# EAGLE board barath pcb 5 (EAGLE 6.5.0)
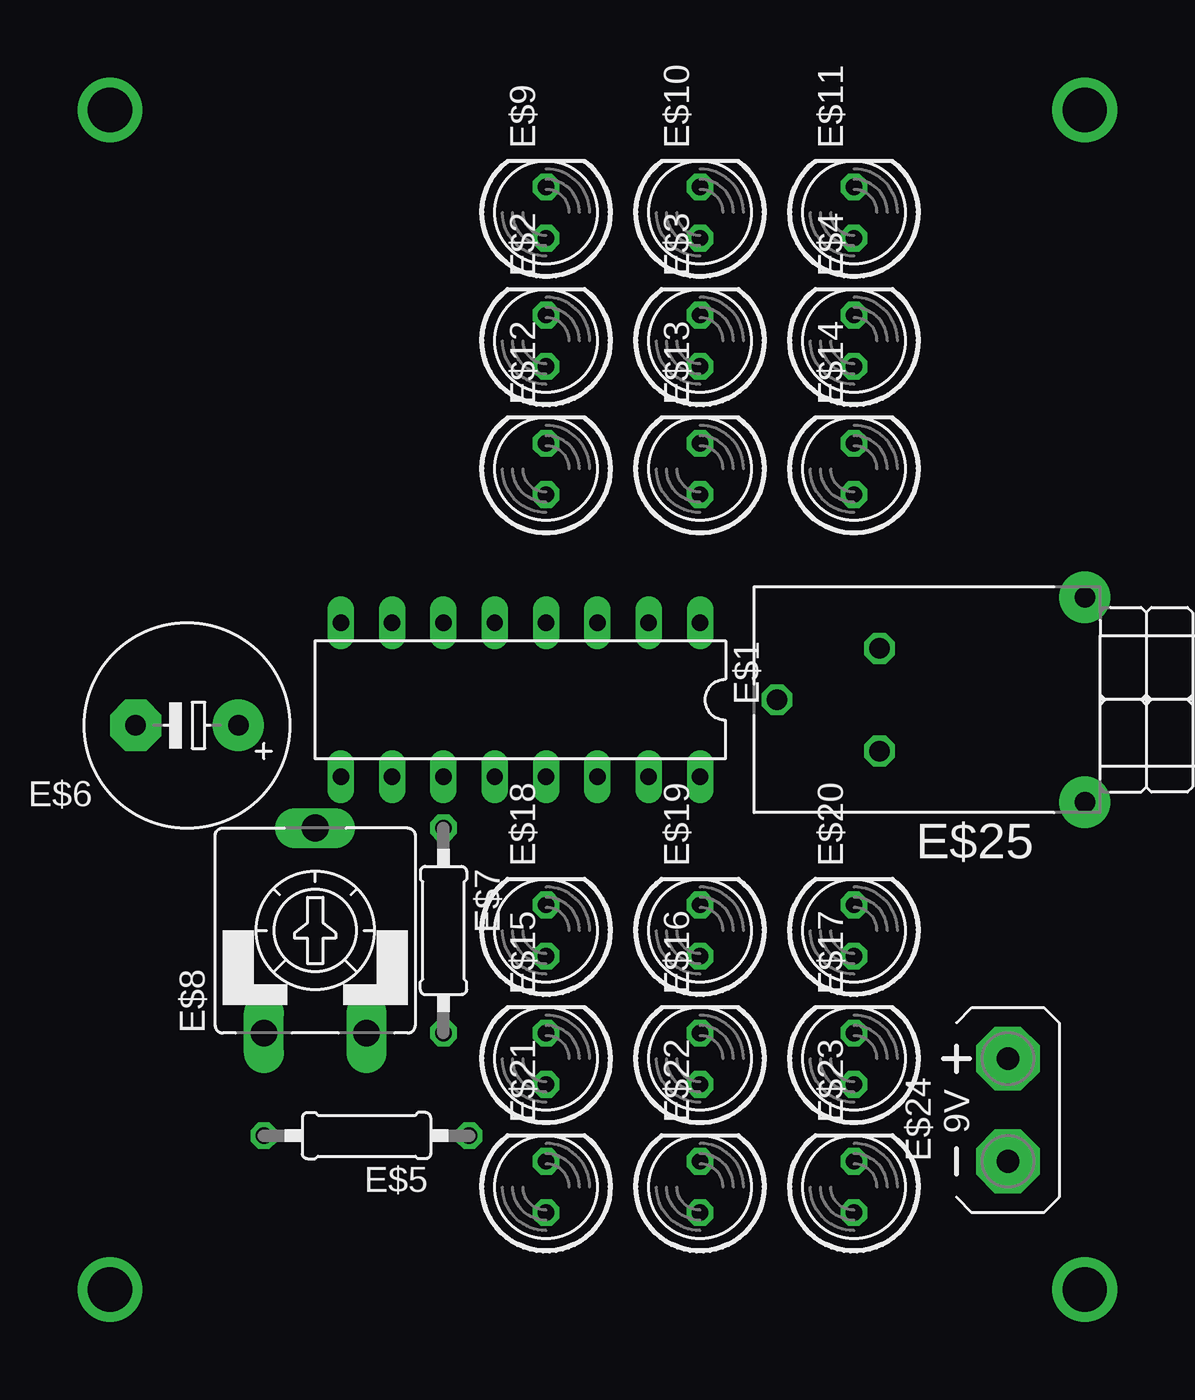
[diagram p0: board, top side]
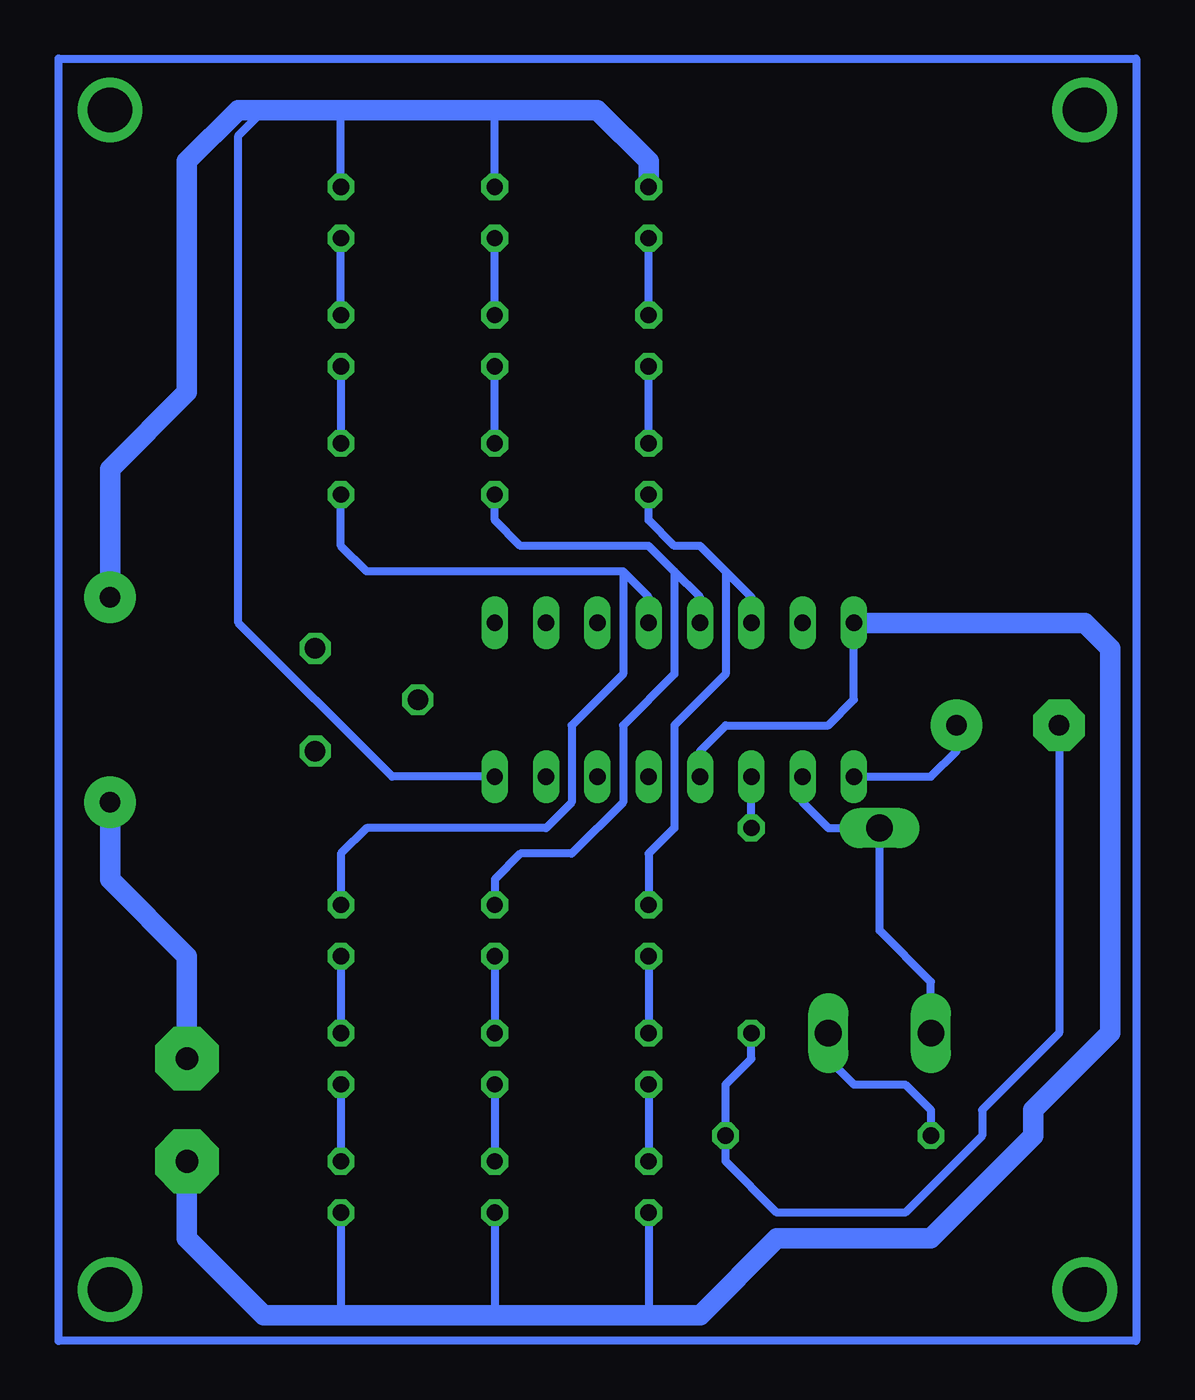
[diagram p1: board, bottom side, seen from below]

No outline drawn. Coordinates in mm, seen from the top.
Copper layers (1*16): Top 0.035mm / dielectric 1.5mm / Bottom 0.035mm
Design rules "default": minimum track width 10mil, minimum drill 24mil, track to track 8mil, track to pad 8mil, pad to pad 8mil, via to via 8mil, smd to smd 8mil, copper to edge 40mil, drill to drill 8mil, minimum pad ring 10mil, minimum via ring 8mil, stop-mask expansion 4mil, vias tented up to drill 0mil, thermal gap 10mil

## Footprints (pad centres in the part's own frame; a part is rotated, then mirrored left to right if it is on the bottom)
DIL16 = drill 0.813 long: 1 -8.89,-3.81; 2 -6.35,-3.81; 3 -3.81,-3.81; 4 -1.27,-3.81; 5 1.27,-3.81; 6 3.81,-3.81; 7 6.35,-3.81; 8 8.89,-3.81; 9 8.89,3.81; 10 6.35,3.81; 11 3.81,3.81; 12 1.27,3.81; 13 -1.27,3.81; 14 -3.81,3.81; 15 -6.35,3.81; 16 -8.89,3.81
LED5MM = drill 0.813 octagon: A -1.27,0; K 1.27,0
0207/10 = drill 0.813 octagon: 1 -5.08,0; 2 5.08,0
E5-10,5 = drill 1.016 pad 2.54: + -2.54,0 | drill 1.016 pad 2.54 octagon: - 2.54,0
CA9V = drill 1.321 long: A -2.54,-5.08; E 2.54,-5.08; S 0,5.08
AB9V = drill 1.118 pad 3.15 octagon: + 0,2.54; - 0,-2.54
316-917 = drill 1.016 octagon: 1 10.16,2.54; 2 15.24,0; 3 10.16,-2.54 | drill 1.016 pad 2.54: B 0,-5.08; B1 0,5.08

## Placement (x,y rotation side)
E$1  [DIL16]  22.86,31.75 180 top
E$2  [LED5MM]  24.13,49.53 90 top
E$3  [LED5MM]  31.75,49.53 90 top
E$4  [LED5MM]  39.37,49.53 90 top
E$5  [0207/10]  15.24,10.16 180 top
E$6  [E5-10,5]  6.35,30.48 180 top
E$7  [0207/10]  19.05,20.32 270 top
E$8  [CA9V]  12.7,20.32 0 top
E$9  [LED5MM]  24.13,55.88 90 top
E$10  [LED5MM]  31.75,55.88 90 top
E$11  [LED5MM]  39.37,55.88 90 top
E$12  [LED5MM]  24.13,43.18 90 top
E$13  [LED5MM]  31.75,43.18 90 top
E$14  [LED5MM]  39.37,43.18 90 top
E$15  [LED5MM]  24.13,13.97 90 top
E$16  [LED5MM]  31.75,13.97 90 top
E$17  [LED5MM]  39.37,13.97 90 top
E$18  [LED5MM]  24.13,20.32 90 top
E$19  [LED5MM]  31.75,20.32 90 top
E$20  [LED5MM]  39.37,20.32 90 top
E$21  [LED5MM]  24.13,7.62 90 top
E$22  [LED5MM]  31.75,7.62 90 top
E$23  [LED5MM]  39.37,7.62 90 top
E$24  [AB9V]  46.99,11.43 0 top
E$25  [316-917]  50.8,31.75 180 top

## Library data of the parts
E$1 = ic-package
E$2-E$4 E$9-E$23 = led
E$5-E$7 = resistor
E$8 = pot
E$24 = battery
E$25 = switch

## Nets
S$2: E$1.6 E$12.A E$18.K
S$3: E$1.5 E$13.A E$19.K
S$4: E$1.4 E$14.A E$20.K
S$5: E$2.A E$12.K
S$6: E$2.K E$9.A
S$7: E$1.9 E$6.+
S$9: E$5.2 E$8.E
S$10: E$1.11 E$7.1
S$11: E$5.1 E$6.- E$7.2
S$13: E$1.8 E$1.12 E$21.A E$22.A E$23.A E$24.-
S$14: E$3.K E$10.A
S$15: E$4.A E$14.K
S$16: E$4.K E$11.A
S$17: E$3.A E$13.K
S$18: E$15.K E$18.A
S$19: E$16.K E$19.A
S$20: E$17.K E$20.A
S$21: E$17.A E$23.K
S$22: E$16.A E$22.K
S$23: E$15.A E$21.K
S$25: E$1.10 E$8.A E$8.S
S$28: E$24.+ E$25.B1
S$29: E$1.16 E$9.K E$10.K E$11.K E$25.B

## Tracks (layer width: path | path; a pad name or v marks a point on that pad's centre or on a via)
S$1
  Bottom 0.406: 0,0 53.34,0 53.34,63.5 0,63.5 0,0
S$2
  Bottom 0.406: E$1.6 19.05,36.83 20.32,38.1 | 20.32,38.1 21.59,39.37 22.86,39.37 24.13,40.64 E$12.A | 20.32,38.1 20.32,33.02 22.86,30.48 22.86,25.4 24.13,24.13 E$18.K
S$3
  Bottom 0.406: E$1.5 21.59,36.83 22.86,38.1 | 22.86,38.1 24.13,39.37 30.48,39.37 31.75,40.64 E$13.A | 22.86,38.1 22.86,33.02 25.4,30.48 25.4,26.67 27.94,24.13 30.48,24.13 31.75,22.86 E$19.K
S$4
  Bottom 0.406: E$1.4 24.13,36.83 25.4,38.1 | 25.4,38.1 38.1,38.1 39.37,39.37 E$14.A | 25.4,38.1 25.4,33.02 27.94,30.48 27.94,26.67 29.21,25.4 38.1,25.4 39.37,24.13 E$20.K
S$5
  Bottom 0.406: E$12.K E$2.A
S$6
  Bottom 0.406: E$2.K E$9.A
S$7
  Bottom 0.406: E$1.9 10.16,27.94 8.89,29.21 E$6.+
S$8  (via drill 2.2 pad 2.54)
  other vias: 2.54,60.96
S$9
  Bottom 0.406: E$8.E 15.24,13.97 13.97,12.7 11.43,12.7 10.16,11.43 E$5.2
S$10
  Bottom 0.406: E$7.1 E$1.11
S$11
  Bottom 0.406: E$6.- 3.81,15.24 7.62,11.43 7.62,10.16 11.43,6.35 17.78,6.35 20.32,8.89 E$5.1 20.32,12.7 19.05,13.97 E$7.2
S$12  (via drill 2.2 pad 2.54)
  other vias: 50.8,60.96
S$13
  Bottom 0.406: E$1.12 21.59,29.21 20.32,30.48 15.24,30.48 13.97,31.75 E$1.8 | E$21.A 24.13,1.27 | E$22.A 31.75,1.27 | E$23.A 39.37,1.27
  Bottom 1.016: E$1.8 2.54,35.56 1.27,34.29 1.27,15.24 5.08,11.43 5.08,10.16 10.16,5.08 11.43,5.08 12.7,5.08 17.78,5.08 21.59,1.27 24.13,1.27 31.75,1.27 39.37,1.27 43.18,1.27 46.99,5.08 E$24.-
S$14
  Bottom 0.406: E$3.K E$10.A
S$15
  Bottom 0.406: E$4.A E$14.K
S$16
  Bottom 0.406: E$4.K E$11.A
S$17
  Bottom 0.406: E$13.K E$3.A
S$18
  Bottom 0.406: E$18.A E$15.K
S$19
  Bottom 0.406: E$19.A E$16.K
S$20
  Bottom 0.406: E$20.A E$17.K
S$21
  Bottom 0.406: E$17.A E$23.K
S$22
  Bottom 0.406: E$16.A E$22.K
S$23
  Bottom 0.406: E$15.A E$21.K
S$25
  Bottom 0.406: E$8.A 10.16,17.78 12.7,20.32 E$8.S 15.24,25.4 16.51,26.67 E$1.10
S$26  (via drill 2.2 pad 2.54)
  other vias: 50.8,2.54
S$27  (via drill 2.2 pad 2.54)
  other vias: 2.54,2.54
S$28
  Bottom 1.016: E$24.+ 46.99,19.05 50.8,22.86 E$25.B1
S$29
  Bottom 0.406: E$1.16 36.83,27.94 44.45,35.56 44.45,59.69 43.18,60.96 | E$10.K 31.75,60.96 | E$11.K 39.37,60.96
  Bottom 1.016: E$25.B 50.8,43.18 46.99,46.99 46.99,58.42 44.45,60.96 43.18,60.96 39.37,60.96 31.75,60.96 26.67,60.96 24.13,58.42 E$9.K